# Altium PCB FlexCube_Matrix_4x4_Project_V1I1a_PCB.PcbDoc (part 2 of 2)
Units mm, origin at the board's own origin, x right, y up, seen from the top; angles counter-clockwise.
Board outline 86 x 86 mm, 2 copper layers (Top Layer, Bottom Layer), stack 0.735 mm thick; 84 components, 69 nets, 228 pads, 76 vias.
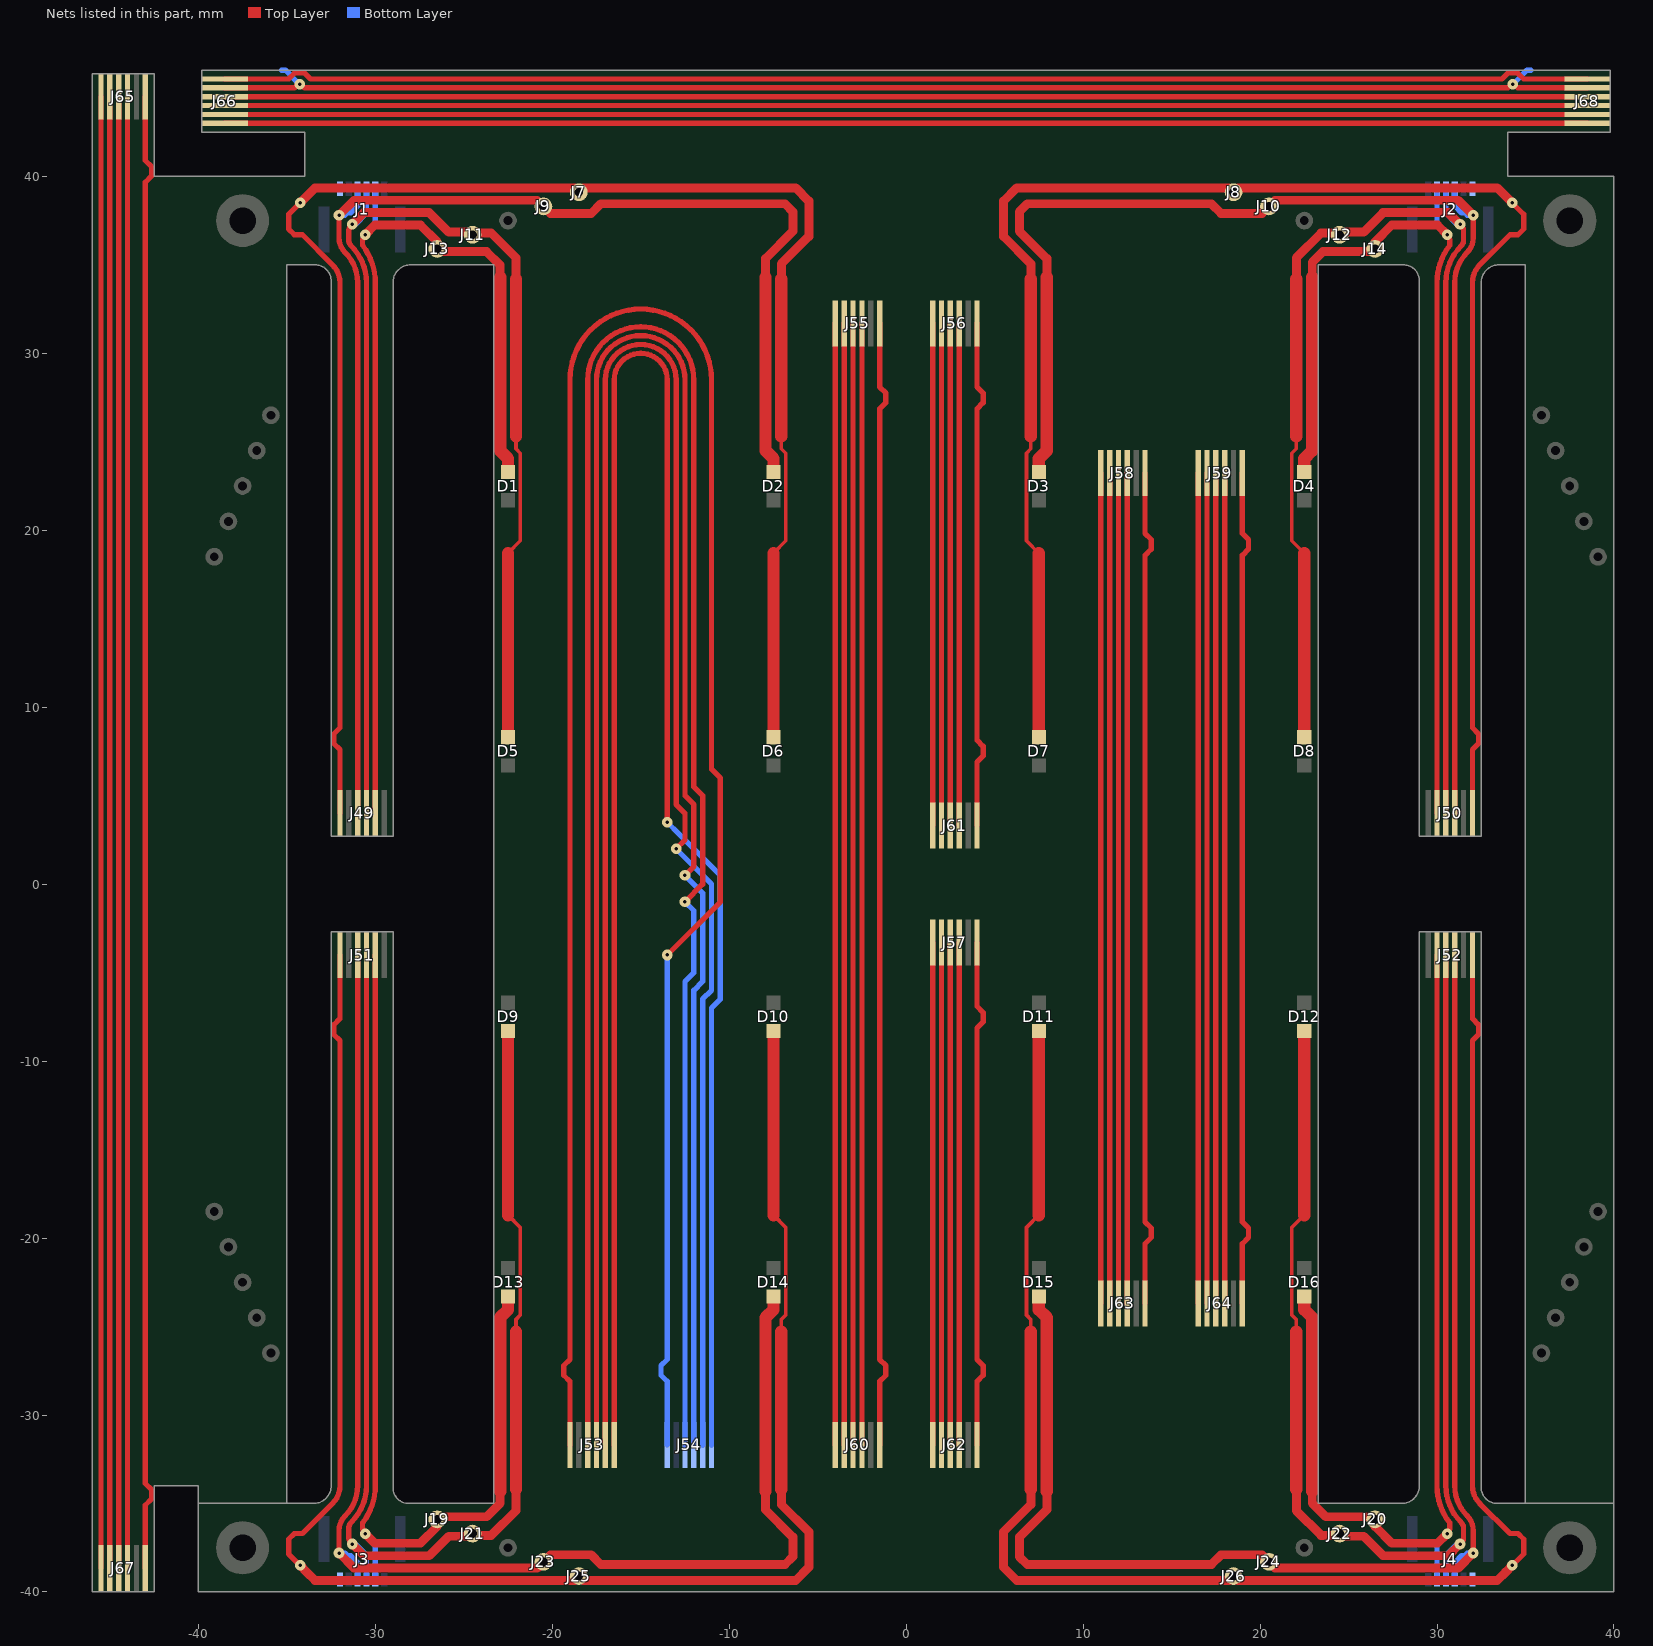
[diagram p2: the nets of this part, all layers, seen from the top]

## Via types
v1: diameter 0.6, hole 0.2, Top Layer to Bottom Layer, tented both sides, 76 vias

## Nets (pads, with @x,y where several pads share a name; then routed paths per layer and width w, separated by ;. In a path a pad name is that pad's centre, name@x,y a point inside that pad or via, vN(x,y) a via of type N, cw(c..) or ccw(c..) an arc to the next point about the centre after c; other vN are vias at no path point) (continued)
GND_08: J66.5 J68.2 | length 79.7
  Top Layer w0.3: J66.5@-38.5,45 -34.562,45 v1@-34.362,45.2 ; v1@-34.2,45.2 -34,45 34,45 v1@34.2,45.2 ; v1@34.362,45.2 34.562,45 J68.2@38.5,45
  Bottom Layer w0.3: -35.3,46 -35.081,46 v1(-34.281,45.2) ; v1(34.281,45.2) 35.081,46 35.3,46
NetD1_2: D1.2 J1.5 J13.1 J49.2 | length 56.9
  Top Layer w0.3: v1(-30.577,36.7) ccw(c-30.231,36.354) -30.581,36.696 ccw(c-30.231,36.354) -30.721,36.354 -30.721,36.093 cw(c-33.4,34) -30,34 J49.2@-30,4.01 J49.2@-30,4
  Top Layer w0.5: v1(-30.577,36.7) -30.027,37.25 -27.45,37.25 -26.5,36.3 J13.1@-26.5,35.9 ; -22.95,34.3 -22.95,34.986 -23.714,35.75 J13.1@-26.35,35.75 ; J13.1@-26.5,35.9 J13.1@-26.35,35.75 ; J13.1@-26.5,35.9 J13.1@-26.35,35.75
  Top Layer w0.7: -22.95,34.3 -22.95,24.5 -22.5,24.05 D1.2@-22.5,23.3
  Bottom Layer w0.3: v1(-30.577,36.7) -30.577,36.732 -30,37.309 J1.5@-30,39.3
NetD2_2: D2.2 J1.3 J9.1 J49.4 | length 78.1
  Top Layer w0.3: v1(-32.05,37.8) -32.05,36.535 ccw(c-30.865,36.535) -31.704,35.698 ; -31.703,35.697 cw(c-33.4,34) -31,34 J49.4@-31,4.01 J49.4@-31,4
  Top Layer w0.5: v1(-32.05,37.8) -31.2,38.65 -30.2,38.65 J9.1@-20.85,38.65 ; J9.1@-20.5,38.3 -20.1,37.9 -17.8,37.9 -17.25,38.45 -6.85,38.45 -6.4,38 -6.4,36.9 -7.95,35.35 -7.95,34.3
  Top Layer w0.7: -7.95,34.3 -7.95,24.5 -7.5,24.05 D2.2@-7.5,23.3
  Bottom Layer w0.3: v1(-32.05,37.8) -31.709,37.8 -31.569,37.94 -31.393,37.94 -31,38.333 J1.3@-31,39.3
NetD3_2: D3.2 J2.4 J10.1 J50.3 | length 78.6
  Top Layer w0.3: J50.3@31,4 J50.3@31,4.01 31,34 cw(c33.4,34) 31.703,35.697 ; 31.704,35.698 ccw(c30.865,36.535) 32.05,36.535 v1(32.05,37.8)
  Top Layer w0.5: 7.95,34.3 7.95,35.35 6.4,36.9 6.4,38 6.85,38.45 17.25,38.45 17.8,37.9 20.1,37.9 J10.1@20.5,38.3 20.85,38.65 30.2,38.65 31.2,38.65 v1(32.05,37.8)
  Top Layer w0.7: D3.2@7.5,23.3 7.5,24.05 7.95,24.5 7.95,34.3
  Bottom Layer w0.3: J2.4@31,39.3 31,38.333 31.393,37.94 31.569,37.94 31.709,37.8 v1(32.05,37.8)
NetD4_2: D4.2 J2.2 J14.1 J50.5 | length 56.7
  Top Layer w0.3: J50.5@30,4 J50.5@30,4.01 30,34 cw(c33.4,34) 30.721,36.093 30.721,36.354 ccw(c30.231,36.354) 30.581,36.696 ccw(c30.231,36.354) v1(30.577,36.7)
  Top Layer w0.5: 22.95,34.3 22.95,35.15 23.55,35.75 24.106,35.75 26.35,35.75 J14.1@26.5,35.9 26.5,36.3 27.45,37.25 30.027,37.25 v1(30.577,36.7)
  Top Layer w0.7: D4.2@22.5,23.3 22.5,24.05 22.95,24.5 22.95,34.3
  Bottom Layer w0.3: J2.2@30,39.3 30,37.309 30.577,36.732 v1(30.577,36.7)
NetD5_2: D5.2 J1.4 J11.1 J49.3 | length 74.2
  Top Layer w0.2: -22.5,18.7 -21.8,19.4 -21.8,19.6 -21.8,24.35 -22.05,24.6 -22.05,25.3
  Top Layer w0.3: v1(-31.3,37.29) -31.366,37.225 ccw(c-31.041,36.9) -31.5,36.9 -31.5,36.414 ccw(c-30.986,36.414) -31.349,36.051 cw(c-33.4,34) -30.5,34 J49.3@-30.5,4.01 J49.3@-30.5,4
  Top Layer w0.5: v1(-31.3,37.29) -30.64,37.95 -26.953,37.95 -25.853,36.85 -24.5,36.85 -24.5,36.8 -23.45,36.8 -22.05,35.4 -22.05,34.2
  Top Layer w0.7: D5.2@-22.5,8.3 -22.5,18.7 ; -22.05,25.3 -22.05,34.2
  Bottom Layer w0.3: v1(-31.3,37.29) -31.13,37.29 -30.5,37.92 J1.4@-30.5,39.3
NetD6_2: D6.2 J1.1 J7.1 J49.6 | length 99.7
  Top Layer w0.2: -7.5,18.7 -6.8,19.4 -6.8,19.6 -6.8,24.35 -7.05,24.6 -7.05,25.3
  Top Layer w0.3: v1(-34.25,38.5) -34.9,37.85 -34.9,37.023 -34.577,36.7 -34.12,36.7 -32.41,34.99 cw(c-33.4,34) -32,34 -32,8.838 -32.35,8.488 -32.35,7.95 -32,7.6 J49.6@-32,4.01 J49.6@-32,4
  Top Layer w0.5: v1(-34.25,38.5) -33.875,38.875 -33.4,39.35 J7.1@-18.75,39.35 ; J7.1@-18.5,39.1 -18.25,39.35 -6.25,39.35 -5.5,38.6 -5.5,36.607 -7.05,35.057 -7.05,34.2
  Top Layer w0.7: D6.2@-7.5,8.3 -7.5,18.7 ; -7.05,25.3 -7.05,34.2
  Bottom Layer w0.2: v1(-34.25,38.5) -33.45,39.3 J1.1@-32,39.3
NetD7_2: D7.2 J2.6 J8.1 J50.1 | length 99.7
  Top Layer w0.2: 7.05,25.3 7.05,24.6 6.8,24.35 6.8,19.6 6.8,19.4 7.5,18.7
  Top Layer w0.3: J50.1@32,4 32,7.6 32.35,7.95 32.35,8.488 32,8.838 32,34 cw(c33.4,34) 32.41,34.99 34.12,36.7 34.577,36.7 34.9,37.023 34.9,37.85 v1(34.25,38.5)
  Top Layer w0.5: 7.05,34.2 7.05,35.057 5.5,36.607 5.5,38.6 6.25,39.35 18.25,39.35 J8.1@18.5,39.1 ; J8.1@18.75,39.35 33.4,39.35 33.875,38.875 v1(34.25,38.5)
  Top Layer w0.7: 7.05,25.3 7.05,34.2 ; D7.2@7.5,8.3 7.5,18.7
  Bottom Layer w0.2: J2.6@32,39.3 33.45,39.3 v1(34.25,38.5)
NetD8_2: D8.2 J2.3 J12.1 J50.4 | length 74.2
  Top Layer w0.2: 22.05,25.3 22.05,24.6 21.8,24.35 21.8,19.6 21.8,19.4 22.5,18.7
  Top Layer w0.3: J50.4@30.5,4 J50.4@30.5,4.01 30.5,34 cw(c33.4,34) 31.349,36.051 ccw(c30.986,36.414) 31.5,36.414 31.5,36.9 ccw(c31.041,36.9) 31.366,37.225 v1(31.3,37.29)
  Top Layer w0.5: 22.05,34.2 22.05,35.4 23.45,36.8 24.5,36.8 24.5,36.85 25.853,36.85 26.953,37.95 30.64,37.95 v1(31.3,37.29)
  Top Layer w0.7: 22.05,25.3 22.05,34.2 ; D8.2@22.5,8.3 22.5,18.7
  Bottom Layer w0.3: J2.3@30.5,39.3 30.5,37.92 31.13,37.29 v1(31.3,37.29)
NetD9_2: D9.2 J3.3 J21.1 J51.4 | length 74.2
  Top Layer w0.2: -22.5,-18.7 -21.8,-19.4 -21.8,-19.6 -21.8,-24.35 -22.05,-24.6 -22.05,-25.3
  Top Layer w0.3: v1(-31.3,-37.29) -31.366,-37.225 cw(c-31.041,-36.9) -31.5,-36.9 -31.5,-36.414 cw(c-30.986,-36.414) -31.349,-36.051 ccw(c-33.4,-34) -30.5,-34 J51.4@-30.5,-4.01 J51.4@-30.5,-4
  Top Layer w0.5: v1(-31.3,-37.29) -30.64,-37.95 -26.953,-37.95 -25.853,-36.85 -24.5,-36.85 -24.5,-36.8 -23.45,-36.8 -22.05,-35.4 -22.05,-34.2
  Top Layer w0.7: -22.5,-18.7 D9.2@-22.5,-8.3 ; -22.05,-34.2 -22.05,-25.3
  Bottom Layer w0.3: v1(-31.3,-37.29) -31.13,-37.29 -30.5,-37.92 J3.3@-30.5,-39.3
NetD10_2: D10.2 J3.6 J25.1 J51.1 | length 100
  Top Layer w0.2: -7.5,-18.7 -6.8,-19.4 -6.8,-19.6 -6.8,-24.35 -7.05,-24.6 -7.05,-25.3
  Top Layer w0.3: v1(-34.25,-38.5) -34.9,-37.85 -34.9,-37.023 -34.577,-36.7 -34.12,-36.7 -32.41,-34.99 ccw(c-33.4,-34) -32,-34 -32,-8.838 -32.35,-8.488 -32.35,-7.95 -32,-7.6 J51.1@-32,-4.01 J51.1@-32,-4
  Top Layer w0.5: v1(-34.25,-38.5) -33.875,-38.875 -33.4,-39.35 -18.75,-39.35 J25.1@-18.5,-39.1 -18.25,-39.35 -6.25,-39.35 -5.5,-38.6 -5.5,-36.607 -7.05,-35.057 -7.05,-34.2
  Top Layer w0.7: -7.5,-18.7 D10.2@-7.5,-8.3 ; -7.05,-34.2 -7.05,-25.3
  Bottom Layer w0.2: v1(-34.25,-38.5) -33.45,-39.3 J3.6@-32,-39.3
NetD11_2: D11.2 J4.1 J26.1 J52.6 | length 99.7
  Top Layer w0.2: 7.05,-25.3 7.05,-24.6 6.8,-24.35 6.8,-19.6 6.8,-19.4 7.5,-18.7
  Top Layer w0.3: J52.6@32,-4 J52.6@32,-4.01 32,-5.76 32,-7.6 32.35,-7.95 32.35,-8.488 32,-8.838 32,-34 ccw(c33.4,-34) 32.41,-34.99 34.12,-36.7 34.577,-36.7 34.9,-37.023 34.9,-37.85 v1(34.25,-38.5)
  Top Layer w0.5: 7.05,-34.2 7.05,-35.057 5.5,-36.607 5.5,-38.6 6.25,-39.35 18.25,-39.35 J26.1@18.5,-39.1 ; J26.1@18.75,-39.35 33.4,-39.35 33.875,-38.875 v1(34.25,-38.5)
  Top Layer w0.7: 7.05,-34.2 7.05,-25.3 ; 7.5,-18.7 D11.2@7.5,-8.3
  Bottom Layer w0.2: J4.1@32,-39.3 33.45,-39.3 v1(34.25,-38.5)
NetD12_2: D12.2 J4.4 J22.1 J52.3 | length 74.2
  Top Layer w0.2: 22.05,-25.3 22.05,-24.6 21.8,-24.35 21.8,-19.6 21.8,-19.4 22.5,-18.7
  Top Layer w0.3: J52.3@30.5,-4 J52.3@30.5,-4.01 30.5,-34 ccw(c33.4,-34) 31.349,-36.051 cw(c30.986,-36.414) 31.5,-36.414 31.5,-36.9 cw(c31.041,-36.9) 31.366,-37.225 v1(31.3,-37.29)
  Top Layer w0.5: 22.05,-34.2 22.05,-35.4 23.45,-36.8 24.5,-36.8 24.5,-36.85 25.853,-36.85 26.953,-37.95 30.64,-37.95 v1(31.3,-37.29)
  Top Layer w0.7: 22.05,-34.2 22.05,-25.3 ; 22.5,-18.7 D12.2@22.5,-8.3
  Bottom Layer w0.3: J4.4@30.5,-39.3 30.5,-37.92 31.13,-37.29 v1(31.3,-37.29)
NetD13_2: D13.2 J3.2 J19.1 J51.5 | length 56.6
  Top Layer w0.3: v1(-30.577,-36.7) cw(c-30.231,-36.354) -30.581,-36.696 cw(c-30.231,-36.354) -30.721,-36.354 -30.721,-36.093 ccw(c-33.4,-34) -30,-34 J51.5@-30,-4.01 J51.5@-30,-4
  Top Layer w0.5: v1(-30.577,-36.7) -30.027,-37.25 -27.45,-37.25 -26.5,-36.3 J19.1@-26.5,-35.9 -26.35,-35.75 -23.713,-35.75 -22.95,-34.987 -22.95,-34.3
  Top Layer w0.7: -22.95,-34.3 -22.95,-24.5 -22.5,-24.05 D13.2@-22.5,-23.3
  Bottom Layer w0.3: v1(-30.577,-36.7) -30.577,-36.732 -30,-37.309 J3.2@-30,-39.3
NetD14_2: D14.2 J3.4 J23.1 J51.3 | length 78.6
  Top Layer w0.3: v1(-32.05,-37.8) -32.05,-36.535 cw(c-30.865,-36.535) -31.704,-35.698 ; -31.703,-35.697 ccw(c-33.4,-34) -31,-34 J51.3@-31,-4.01 J51.3@-31,-4
  Top Layer w0.5: v1(-32.05,-37.8) -31.2,-38.65 -30.2,-38.65 -20.85,-38.65 J23.1@-20.5,-38.3 -20.1,-37.9 -17.8,-37.9 -17.25,-38.45 -6.85,-38.45 -6.4,-38 -6.4,-36.9 -7.95,-35.35 -7.95,-34.3
  Top Layer w0.7: -7.95,-34.3 -7.95,-24.5 -7.5,-24.05 D14.2@-7.5,-23.3
  Bottom Layer w0.3: v1(-32.05,-37.8) -31.709,-37.8 -31.569,-37.94 -31.393,-37.94 -31,-38.333 J3.4@-31,-39.3
NetD15_2: D15.2 J4.3 J24.1 J52.4 | length 78.6
  Top Layer w0.3: J52.4@31,-4 J52.4@31,-4.01 31,-34 ccw(c33.4,-34) 31.703,-35.697 ; 31.704,-35.698 cw(c30.865,-36.535) 32.05,-36.535 v1(32.05,-37.8)
  Top Layer w0.5: 7.95,-34.3 7.95,-35.35 6.4,-36.9 6.4,-38 6.85,-38.45 17.25,-38.45 17.8,-37.9 20.1,-37.9 J24.1@20.5,-38.3 20.85,-38.65 30.2,-38.65 31.2,-38.65 v1(32.05,-37.8)
  Top Layer w0.7: D15.2@7.5,-23.3 7.5,-24.05 7.95,-24.5 7.95,-34.3
  Bottom Layer w0.3: J4.3@31,-39.3 31,-38.333 31.393,-37.94 31.569,-37.94 31.709,-37.8 v1(32.05,-37.8)
NetD16_2: D16.2 J4.5 J20.1 J52.2 | length 56.6
  Top Layer w0.3: J52.2@30,-4 J52.2@30,-4.01 30,-34 ccw(c33.4,-34) 30.721,-36.093 30.721,-36.354 cw(c30.231,-36.354) 30.581,-36.696 cw(c30.231,-36.354) v1(30.577,-36.7)
  Top Layer w0.5: 22.95,-34.3 22.95,-34.986 23.714,-35.75 26.35,-35.75 J20.1@26.5,-35.9 26.5,-36.3 27.45,-37.25 30.027,-37.25 v1(30.577,-36.7)
  Top Layer w0.7: D16.2@22.5,-23.3 22.5,-24.05 22.95,-24.5 22.95,-34.3
  Bottom Layer w0.3: J4.5@30,-39.3 30,-37.309 30.577,-36.732 v1(30.577,-36.7)
NetJ53_1: J53.1 J54.6 | length 126.5
  Top Layer w0.3: J53.1@-16.5,-31.7 -16.5,28.46 ; -16.5,28.5 cw(c-15,28.5) -15,30 cw(c-15,28.5) -13.5,28.5 v1(-13.5,3.5)
  Bottom Layer w0.3: v1(-13.5,3.5) -12.833,2.833 -10.5,0.5 -10.5,-6.5 -11,-7 J54.6@-11,-31.7
NetJ53_2: J53.2 J54.5 | length 128.1
  Top Layer w0.3: J53.2@-17,-31.7 -17,28.46 ; -17,28.5 cw(c-15,28.5) -15,30.5 cw(c-15,28.5) -13,28.5 -13,4.5 -12.5,4 -12.5,2.5 v1(-13,2)
  Bottom Layer w0.3: v1(-13,2) -11,0 -11,-6 -11.5,-6.5 J54.5@-11.5,-31.7
NetJ53_3: J53.3 J54.4 | length 129.3
  Top Layer w0.3: J53.3@-17.5,-31.7 -17.5,28.5 cw(c-15,28.5) -15,31 cw(c-15,28.5) -12.5,28.5 -12.5,5 -12,4.5 -12,1 v1(-12.5,0.5)
  Bottom Layer w0.3: v1(-12.5,0.5) -11.5,-0.5 -11.5,-5.5 -12,-6 J54.4@-12,-31.7
NetJ53_4: J53.4 J54.3 | length 130.9
  Top Layer w0.3: J53.4@-18,-31.7 -18,28.5 cw(c-15,28.5) -15,31.5 cw(c-15,28.5) -12,28.5 -12,5.5 -11.5,5 -11.5,0 v1(-12.5,-1)
  Bottom Layer w0.3: J54.3@-12.5,-31.7 -12.5,-5.5 -12,-5 -12,-1.5 v1(-12.5,-1)
NetJ53_6: J53.6 J54.1 | length 135
  Top Layer w0.3: J53.6@-19,-31.7 J53.6@-19,-31.69 -19,-28.1 -19.35,-27.75 -19.35,-27.212 -19,-26.862 -19,28.5 cw(c-15,28.5) -15,32.5 cw(c-15,28.5) -11,28.5 -11,6.5 -10.5,6 -10.5,-1 v1(-13.5,-4)
  Bottom Layer w0.3: J54.1@-13.5,-31.69 -13.5,-28.1 -13.85,-27.75 -13.85,-27.212 -13.5,-26.862 v1(-13.5,-4)
NetJ55_1: J55.1 J60.6 | length 63.4
  Top Layer w0.3: J60.6@-4,-31.69 J55.1@-4,31.69
NetJ55_2: J55.2 J60.5 | length 63.4
  Top Layer w0.3: J60.5@-3.5,-31.69 J55.2@-3.5,31.69
NetJ55_3: J55.3 J60.4 | length 63.4
  Top Layer w0.3: J60.4@-3,-31.69 J55.3@-3,31.69
NetJ55_4: J55.4 J60.3 | length 63.4
  Top Layer w0.3: J60.3@-2.5,-31.69 J55.4@-2.5,31.69
NetJ55_6: J55.6 J60.1 | length 64
  Top Layer w0.3: J60.1@-1.5,-31.69 -1.5,-28.1 -1.15,-27.75 -1.15,-27.212 -1.5,-26.862 -1.5,26.862 -1.15,27.212 -1.15,27.75 -1.5,28.1 J55.6@-1.5,31.69
NetJ56_1: J56.1 J61.6 | length 28.4
  Top Layer w0.3: J61.6@1.5,3.31 J56.1@1.5,31.69
NetJ56_2: J56.2 J61.5 | length 28.4
  Top Layer w0.3: J61.5@2,3.31 J56.2@2,31.69
NetJ56_3: J56.3 J61.4 | length 28.4
  Top Layer w0.3: J61.4@2.5,3.31 J56.3@2.5,31.69
NetJ56_4: J56.4 J61.3 | length 28.4
  Top Layer w0.3: J61.3@3,3.31 J56.4@3,31.69
NetJ56_6: J56.6 J61.1 | length 29
  Top Layer w0.3: J61.1@4,3.31 4,6.9 4.35,7.25 4.35,7.788 4,8.138 4,26.862 4.35,27.212 4.35,27.75 4,28.1 J56.6@4,31.69
NetJ57_1: J57.1 J62.6 | length 28.4
  Top Layer w0.3: J62.6@1.5,-31.69 J57.1@1.5,-3.31
NetJ57_2: J57.2 J62.5 | length 28.4
  Top Layer w0.3: J62.5@2,-31.69 J57.2@2,-3.31
NetJ57_3: J57.3 J62.4 | length 28.4
  Top Layer w0.3: J62.4@2.5,-31.69 J57.3@2.5,-3.31
NetJ57_4: J57.4 J62.3 | length 28.4
  Top Layer w0.3: J62.3@3,-31.69 J57.4@3,-3.31
NetJ57_6: J57.6 J62.1 | length 29
  Top Layer w0.3: J62.1@4,-31.69 4,-28.1 4.35,-27.75 4.35,-27.212 4,-26.862 4,-8.138 4.35,-7.788 4.35,-7.25 4,-6.9 J57.6@4,-3.31
NetJ58_1: J58.1 J63.6 | length 46.9
  Top Layer w0.3: J63.6@11,-23.69 J58.1@11,23.234
NetJ58_2: J58.2 J63.5 | length 46.9
  Top Layer w0.3: J63.5@11.5,-23.69 J58.2@11.5,23.234
NetJ58_3: J58.3 J63.4 | length 46.9
  Top Layer w0.3: J63.4@12,-23.69 J58.3@12,23.234
NetJ58_4: J58.4 J63.3 | length 46.9
  Top Layer w0.3: J63.3@12.5,-23.69 J58.4@12.5,23.234
NetJ58_6: J58.6 J63.1 | length 47.5
  Top Layer w0.3: J63.1@13.5,-23.69 13.5,-20.319 13.85,-19.969 13.85,-19.431 13.5,-19.081 13.5,18.581 13.85,18.931 13.85,19.469 13.5,19.819 J58.6@13.5,23.234
NetJ59_1: J59.1 J64.6 | length 46.9
  Top Layer w0.3: J64.6@16.5,-23.69 J59.1@16.5,23.234
NetJ59_2: J59.2 J64.5 | length 46.9
  Top Layer w0.3: J64.5@17,-23.69 J59.2@17,23.234
NetJ59_3: J59.3 J64.4 | length 46.9
  Top Layer w0.3: J64.4@17.5,-23.69 J59.3@17.5,23.234
NetJ59_4: J59.4 J64.3 | length 46.9
  Top Layer w0.3: J64.3@18,-23.69 J59.4@18,23.234
NetJ59_6: J59.6 J64.1 | length 47.5
  Top Layer w0.3: J64.1@19,-23.69 19,-20.319 19.35,-19.969 19.35,-19.431 19,-19.081 19,18.581 19.35,18.931 19.35,19.469 19,19.819 J59.6@19,23.234
NetJ65_1: J65.1 J67.6 | length 83.1
  Top Layer w0.3: J67.6@-45.5,-38.65 J65.1@-45.5,44.5
NetJ65_2: J65.2 J67.5 | length 83.1
  Top Layer w0.3: J67.5@-45,-38.65 J65.2@-45,44.5
NetJ65_3: J65.3 J67.4 | length 83.1
  Top Layer w0.3: J67.4@-44.5,-38.65 J65.3@-44.5,44.5
NetJ65_4: J65.4 J67.3 | length 83.1
  Top Layer w0.3: J67.3@-44,-38.65 J65.4@-44,44.5
NetJ65_6: J65.6 J67.1 | length 83.7
  Top Layer w0.3: J67.1@-43,-38.65 -43,-35.1 -42.65,-34.75 -42.65,-34.212 -43,-33.862 -43,39.662 -42.65,40.012 -42.65,40.55 -43,40.9 J65.6@-43,44.5
NetJ66_1: J66.1 J68.6 | length 77
  Top Layer w0.3: J66.1@-38.5,43 J68.6@38.5,43
NetJ66_2: J66.2 J68.5 | length 77
  Top Layer w0.3: J66.2@-38.5,43.5 J68.5@38.5,43.5
NetJ66_3: J66.3 J68.4 | length 77
  Top Layer w0.3: J66.3@-38.5,44 J68.4@38.5,44
NetJ66_4: J66.4 J68.3 | length 77
  Top Layer w0.3: J66.4@-38.5,44.5 J68.3@38.5,44.5
NetJ66_6: J66.6 J68.1 | length 77.6
  Top Layer w0.3: J66.6@-38.5,45.5 -34.9,45.5 -34.55,45.85 -34.012,45.85 -33.662,45.5 33.662,45.5 34.012,45.85 34.55,45.85 34.9,45.5 J68.1@38.5,45.5
pads on no net: J29.1 J30.1 J31.1 J32.1 J33.1 J34.1 J35.1 J36.1 J37.1 J38.1 J39.1 J40.1 J41.1 J42.1 J43.1 J44.1 J45.1 J46.1 J47.1 J48.1

## Polygon pours and split planes (outlines as drawn)
no net on Layer0 "Default Coverlay 4 Top" (split plane): -19.5,-28.5 -19.5,29.084 -19.428,29.628 -19.286,30.159 -19.076,30.667 -18.801,31.142 -18.467,31.578 -18.078,31.967 -17.642,32.301 -17.167,32.576 -16.659,32.786 -16.128,32.928 -15.584,33 -14.416,33 -13.872,32.928 -13.341,32.786 -12.833,32.576 -12.358,32.301 -11.922,31.967 -11.533,31.578 -11.199,31.142 -10.924,30.667 -10.714,30.159 -10.572,29.628 -10.5,29.084 -10.5,-28.5 -14,-28.5 -14,28.5 -14.005,28.598 -14.043,28.79 -14.118,28.971 -14.227,29.134 -14.366,29.273 -14.529,29.382 -14.71,29.457 -14.902,29.495 -15,29.5 -15.098,29.495 -15.29,29.457 -15.471,29.382 -15.634,29.273 -15.773,29.134 -15.882,28.971 -15.957,28.79 -15.995,28.598 -16,28.5 -16,-28.5
no net on Layer0 "Default Coverlay 4 Top" (split plane): -42.5,-35.5 -42.5,41.3 -46,41.3 -46,-35.5
no net on Layer0 "Default Coverlay 4 Top" (split plane): 35.3,46 -35.3,46 -35.3,42.5 35.3,42.5
no net on Layer0 "Default Coverlay 4 Top" (split plane): 19.5,-20.5 19.5,20.1 16,20.1 16,-20.5
no net on Layer0 "Default Coverlay 4 Top" (split plane): 14,-20.5 14,20.1 10.5,20.1 10.5,-20.5
no net on Layer0 "Default Coverlay 4 Top" (split plane): 4.5,-28.5 4.5,-6.5 1,-6.5 1,-28.5
no net on Layer0 "Default Coverlay 4 Top" (split plane): 4.5,6.5 4.5,28.5 1,28.5 1,6.5
no net on Layer0 "Default Coverlay 4 Top" (split plane): -1,-28.5 -1,28.5 -4.5,28.5 -4.5,-28.5
no net on Layer0 "Default Coverlay 4 Top" (split plane): 32.5,7.2 32.5,34.3 33.2,34.999 28.3,34.999 29,34.3 29,7.2
no net on Layer0 "Default Coverlay 4 Top" (split plane): -29,7.2 -29,34.3 -28.3,34.999 -33.2,34.999 -32.5,34.3 -32.5,7.2
no net on Layer0 "Default Coverlay 4 Top" (split plane): 29,-7.201 29,-34.301 28.3,-35 33.199,-35 32.5,-34.301 32.5,-7.201
no net on Layer0 "Default Coverlay 4 Top" (split plane): -32.5,-7.2 -32.5,-34.3 -33.2,-34.999 -28.3,-34.999 -29,-34.3 -29,-7.2
GND_08 on Bottom Layer "Bottom Layer-GND 6" (hatched 45Degree grid 0.9 track 0.3, remove dead copper, pour order 71): -35.3,42.5 -35.3,46 35.3,46 35.3,42.5
GND_07 on Bottom Layer "Bottom Layer-GND 6" (hatched 45Degree grid 0.9 track 0.3, remove dead copper, pour order 70): -46,41.3 -42.5,41.3 -42.5,-35.5 -46,-35.5
GND_01 on Bottom Layer "NONET_L-01_P-001" (hatched 45Degree grid 0.9 track 0.3, pour order 69): -10.5,28.5 -14,28.5 ccw(c-15,28.5) -15,29.5 ccw(c-15,28.5) -16,28.5 -19.5,28.5 -19.5,28.809 cw(c-15.309,28.809) -15.309,33 -14.691,33 cw(c-14.622,28.878) -10.5,28.946
GND_01 on Bottom Layer "Bottom Layer-GND_01" (hatched 45Degree grid 0.9 track 0.3, remove dead copper, pour order 63): -14,3.5 -10.5,3.5 -10.5,28.5 -14,28.5
GND_04 on Bottom Layer "Bottom Layer-GND_04" (hatched 45Degree grid 0.9 track 0.3, remove dead copper, pour order 58): 1,-28.5 4.5,-28.5 4.5,-6.5 1,-6.5
GND_03 on Bottom Layer "Bottom Layer-GND_03" (hatched 45Degree grid 0.9 track 0.3, remove dead copper, pour order 57): 1,6.5 4.5,6.5 4.5,28.5 1,28.5
GND on Bottom Layer "Bottom Layer-GND 6" (hatched 45Degree grid 0.9 track 0.3, remove dead copper, pour order 53): -32.5,39.7 -29,39.7 -29,7.2 -32.5,7.2
GND_05 on Bottom Layer "Bottom Layer-GND_05" (hatched 45Degree grid 0.9 track 0.3, remove dead copper, pour order 62): 10.5,-20.5 14,-20.5 14,20.044 10.5,20.044
GND_06 on Bottom Layer "Bottom Layer-GND_06" (hatched 45Degree grid 0.9 track 0.3, remove dead copper, pour order 61): 16,-20.5 19.5,-20.5 19.5,20.044 16,20.044
GND on Bottom Layer "Bottom Layer-GND 3" (hatched 45Degree grid 0.9 track 0.3, remove dead copper, pour order 60): 32.5,-39.7 29,-39.7 29,-7.2 32.5,-7.2
GND on Bottom Layer "Bottom Layer-GND 4" (hatched 45Degree grid 0.9 track 0.3, remove dead copper, pour order 59): 32.5,39.7 29,39.7 29,7.2 32.5,7.2
GND_02 on Bottom Layer "Bottom Layer-GND_02" (hatched 45Degree grid 0.9 track 0.3, remove dead copper, pour order 56): -4.5,-28.5 -1,-28.5 -1,28.5 -4.5,28.5
GND_01 on Bottom Layer "Bottom Layer-GND_01" (hatched 45Degree grid 0.9 track 0.3, remove dead copper, pour order 54): -19.5,-28.5 -16,-28.5 -16,28.5 -19.5,28.5
GND on Bottom Layer "Bottom Layer-GND 7" (hatched 45Degree grid 0.9 track 0.3, remove dead copper, pour order 52): -32.5,-39.7 -29,-39.7 -29,-7.2 -32.5,-7.2
GND on Bottom Layer "Bottom Layer-GND 5" (solid, pour order 51): 39.7,39.7 35.195,39.7 35.195,-39.7 39.7,-39.7
GND on Bottom Layer "Bottom Layer-GND 8" (solid, pour order 50): -39.7,39.7 -35.195,39.7 -35.195,-39.7 -39.7,-39.7
GND on Bottom Layer "Bottom Layer-GND" (solid, remove dead copper, pour order 49): -39.7,35.3 -39.7,39.7 1.5,39.7 1.5,35.3
GND on Bottom Layer "Bottom Layer-GND" (solid, remove dead copper, pour order 48): 39.7,35.3 39.7,39.7 -1.5,39.7 -1.5,35.3
no net on Bottom Layer "Bottom Layer-GND 2" (solid, pour order 47): 21.7,36.5 23.3,36.5 23.3,-35.5 21.7,-35.5
no net on Bottom Layer "Bottom Layer-GND 2" (solid, pour order 46): 6.7,36.5 8.3,36.5 8.3,-35.5 6.7,-35.5
GND on Bottom Layer "Bottom Layer-GND" (solid, remove dead copper, pour order 45): 39.7,-35.3 39.7,-39.7 -1.5,-39.7 -1.5,-35.3
GND on Bottom Layer "Bottom Layer-GND" (solid, remove dead copper, pour order 44): -39.7,-35.3 -39.7,-39.7 1.5,-39.7 1.5,-35.3
no net on Bottom Layer "Bottom Layer-GND 1" (solid, pour order 43): -8.3,36.5 -6.7,36.5 -6.7,-35.5 -8.3,-35.5
no net on Bottom Layer "Bottom Layer-GND 2" (solid, pour order 42): -23.3,36.5 -21.7,36.5 -21.7,-35.5 -23.3,-35.5
GND_01 on Top Layer "Top Layer-GND_01" (hatched 45Degree grid 0.9 track 0.3, remove dead copper, pour order 55): -14,-28.5 -10.5,-28.5 -10.5,-4 -14,-4
no net on Layer0 "Default Coverlay 4 Bottom" (split plane): -19.5,-28.5 -19.5,29.084 -19.428,29.628 -19.286,30.159 -19.076,30.667 -18.801,31.142 -18.467,31.578 -18.078,31.967 -17.642,32.301 -17.167,32.576 -16.659,32.786 -16.128,32.928 -15.584,33 -14.416,33 -13.872,32.928 -13.341,32.786 -12.833,32.576 -12.358,32.301 -11.922,31.967 -11.533,31.578 -11.199,31.142 -10.924,30.667 -10.714,30.159 -10.572,29.628 -10.5,29.084 -10.5,-28.5 -14,-28.5 -14,28.5 -14.005,28.598 -14.043,28.79 -14.118,28.971 -14.227,29.134 -14.366,29.273 -14.529,29.382 -14.71,29.457 -14.902,29.495 -15,29.5 -15.098,29.495 -15.29,29.457 -15.471,29.382 -15.634,29.273 -15.773,29.134 -15.882,28.971 -15.957,28.79 -15.995,28.598 -16,28.5 -16,-28.5
no net on Layer0 "Default Coverlay 4 Bottom" (split plane): -42.5,-35.5 -42.5,41.3 -46,41.3 -46,-35.5
no net on Layer0 "Default Coverlay 4 Bottom" (split plane): 35.3,46 -35.3,46 -35.3,42.5 35.3,42.5
no net on Layer0 "Default Coverlay 4 Bottom" (split plane): 19.5,-20.5 19.5,20.1 16,20.1 16,-20.5
no net on Layer0 "Default Coverlay 4 Bottom" (split plane): 14,-20.5 14,20.1 10.5,20.1 10.5,-20.5
no net on Layer0 "Default Coverlay 4 Bottom" (split plane): 4.5,-28.5 4.5,-6.5 1,-6.5 1,-28.5
no net on Layer0 "Default Coverlay 4 Bottom" (split plane): 4.5,6.5 4.5,28.5 1,28.5 1,6.5
no net on Layer0 "Default Coverlay 4 Bottom" (split plane): -1,-28.5 -1,28.5 -4.5,28.5 -4.5,-28.5
no net on Layer0 "Default Coverlay 4 Bottom" (split plane): 32.5,7.2 32.5,34.3 33.2,34.999 28.3,34.999 29,34.3 29,7.2
no net on Layer0 "Default Coverlay 4 Bottom" (split plane): -29,7.2 -29,34.3 -28.3,34.999 -33.2,34.999 -32.5,34.3 -32.5,7.2
no net on Layer0 "Default Coverlay 4 Bottom" (split plane): 29,-7.201 29,-34.301 28.3,-35 33.199,-35 32.5,-34.301 32.5,-7.201
no net on Layer0 "Default Coverlay 4 Bottom" (split plane): -32.5,-7.2 -32.5,-34.3 -33.2,-34.999 -28.3,-34.999 -29,-34.3 -29,-7.2
no net on Layer0 "Default Coverlay 6 Top" (split plane): 35,35 35,-34.999 40,-34.999 40,35
no net on Layer0 "Default Coverlay 6 Top" (split plane): -40,35 -40,-34.999 -35,-34.999 -35,35
no net on Layer0 "Default Coverlay 6 Top" (split plane): -40,35 40,35 40,40 -40,40
no net on Layer0 "Default Coverlay 6 Top" (split plane): -40,-40 40,-40 40,-35 -40,-35
no net on Layer0 "Default Coverlay 6 Bottom" (split plane): 35,35 35,-34.999 40,-34.999 40,35
no net on Layer0 "Default Coverlay 6 Bottom" (split plane): -40,35 -40,-34.999 -35,-34.999 -35,35
no net on Layer0 "Default Coverlay 6 Bottom" (split plane): -40,35 40,35 40,40 -40,40
no net on Layer0 "Default Coverlay 6 Bottom" (split plane): -40,-40 40,-40 40,-35 -40,-35
no net on Layer0 "Default Coverlay 1 Top" (split plane): -19.5,-28.5 -19.5,33 -10.5,33 -10.5,-28.5 -14,-28.5 -14,28 -16,28 -16,-28.5
no net on Layer0 "Default Coverlay 1 Bottom" (split plane): -19.5,-28.5 -19.5,33 -10.5,33 -10.5,-28.5 -14,-28.5 -14,28 -16,28 -16,-28.5
no net on Layer0 "Default Coverlay 3 Bottom" (split plane): 35.3,42.5 39.8,42.5 39.8,46 35.3,46
no net on Layer0 "Default Coverlay 3 Bottom" (split plane): 29,2.7 32.5,2.7 32.5,7.2 29,7.2
no net on Layer0 "Default Coverlay 3 Bottom" (split plane): 29,-7.201 32.5,-7.201 32.5,-2.701 29,-2.701
no net on Layer0 "Default Coverlay 3 Bottom" (split plane): 16,-25 19.5,-25 19.5,-20.5 16,-20.5
no net on Layer0 "Default Coverlay 3 Bottom" (split plane): 16,20.1 19.5,20.1 19.5,24.6 16,24.6
no net on Layer0 "Default Coverlay 3 Bottom" (split plane): 10.5,-25 14,-25 14,-20.5 10.5,-20.5
no net on Layer0 "Default Coverlay 3 Bottom" (split plane): 10.5,20.1 14,20.1 14,24.6 10.5,24.6
no net on Layer0 "Default Coverlay 3 Bottom" (split plane): 1,2 4.5,2 4.5,6.5 1,6.5
no net on Layer0 "Default Coverlay 3 Bottom" (split plane): 1,-33 4.5,-33 4.5,-28.5 1,-28.5
no net on Layer0 "Default Coverlay 3 Bottom" (split plane): 1,28.5 4.5,28.5 4.5,33 1,33
no net on Layer0 "Default Coverlay 3 Bottom" (split plane): -4.5,-33 -1,-33 -1,-28.5 -4.5,-28.5
no net on Layer0 "Default Coverlay 3 Bottom" (split plane): -4.5,28.5 -1,28.5 -1,33 -4.5,33
no net on Layer0 "Default Coverlay 3 Bottom" (split plane): -19.5,-33 -16,-33 -16,-28.5 -19.5,-28.5
no net on Layer0 "Default Coverlay 3 Bottom" (split plane): -32.5,2.7 -29,2.7 -29,7.2 -32.5,7.2
no net on Layer0 "Default Coverlay 3 Bottom" (split plane): -32.5,-7.2 -29,-7.2 -29,-2.7 -32.5,-2.7
no net on Layer0 "Default Coverlay 3 Bottom" (split plane): -39.8,42.5 -35.3,42.5 -35.3,46 -39.8,46
no net on Layer0 "Default Coverlay 3 Bottom" (split plane): -46,-40 -42.5,-40 -42.5,-35.5 -46,-35.5
no net on Layer0 "Default Coverlay 3 Bottom" (split plane): -46,41.3 -42.5,41.3 -42.5,45.8 -46,45.8
no net on Layer0 "Default Coverlay 3 Bottom" (split plane): 1,-6.5 4.5,-6.5 4.5,-2 1,-2
no net on Layer0 "Default Coverlay 2 Top" (split plane): -14,-33 -10.5,-33 -10.5,-28.5 -14,-28.5

## Silkscreen, mask and mechanical layers (free items; w line width, h text height)
Board Shape:
  drawing of 225 lines, arcs and shapes, not listed
Top Stiffeners:
  rectangle: -40,35 40,40
  rectangle: -40,-35 -35,35
  rectangle: 35,-35 40,35
  rectangle: -40,-40 40,-35
  rectangle: -14,-33 -10.5,-28.5
Bottom Stiffeners:
  rectangle: 1,-6.5 4.5,-2
  rectangle: 1,2 4.5,6.5
  rectangle: 1,28.5 4.5,33
  rectangle: -4.5,28.5 -1,33
  rectangle: 16,20.1 19.5,24.6
  rectangle: 10.5,20.1 14,24.6
  rectangle: 29,2.7 32.5,7.2
  rectangle: 29,-7.2 32.5,-2.7
  rectangle: 16,-25 19.5,-20.5
  rectangle: 10.5,-25 14,-20.5
  rectangle: 1,-33 4.5,-28.5
  rectangle: -4.5,-33 -1,-28.5
  rectangle: -19.5,-33 -16,-28.5
  rectangle: -32.5,-7.2 -29,-2.7
  rectangle: -32.5,2.7 -29,7.2
  rectangle: 35.3,42.5 39.8,46
  rectangle: -39.8,42.5 -35.3,46
  rectangle: -46,-40 -42.5,-35.5
  rectangle: -46,41.3 -42.5,45.8